# Altium PCB minireg-lt8410.PcbDoc
Units mm, origin at the board's own origin, x right, y up, seen from the top; angles counter-clockwise.
Board outline 10 x 10 mm, 4 copper layers (Top Layer, Mid-Layer 1, Mid-Layer 2, Bottom Layer); 11 components, 7 nets, 67 pads, 20 vias.
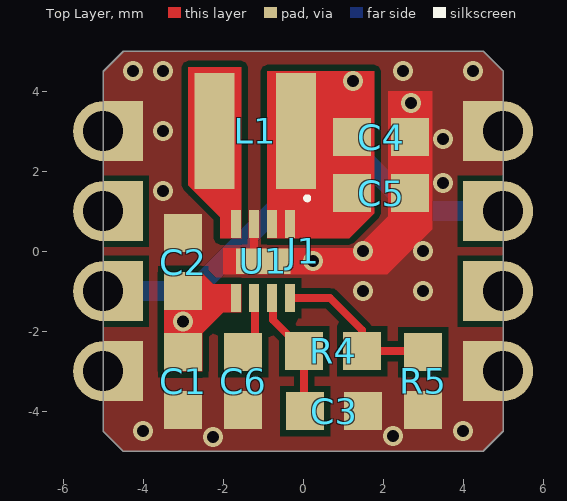
[diagram p0: Top Layer view]
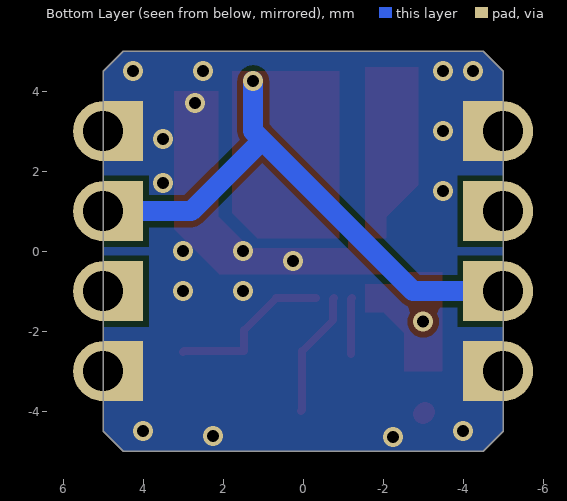
[diagram p1: Bottom Layer view, seen from below]
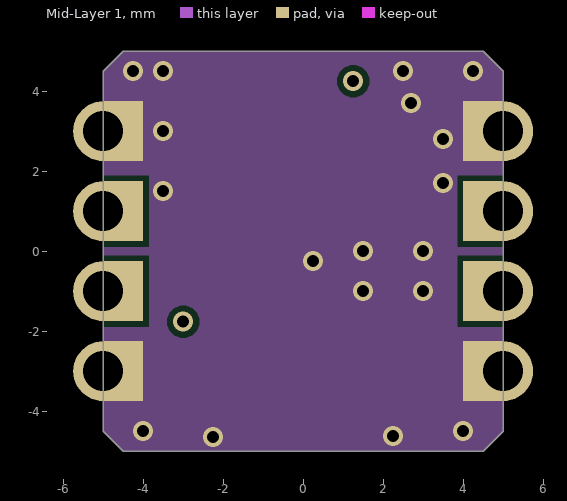
[diagram p2: Mid-Layer 1]
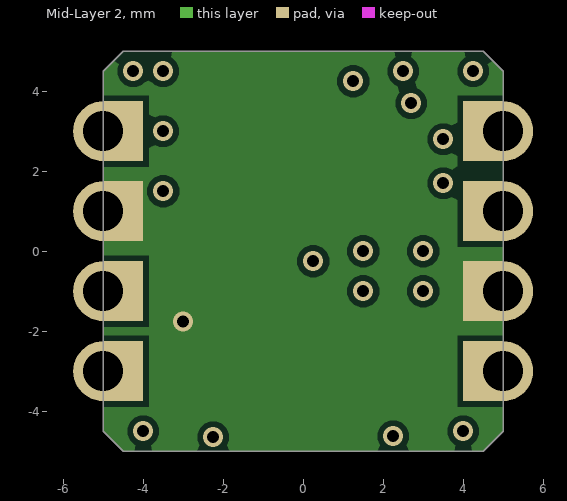
[diagram p3: Mid-Layer 2]
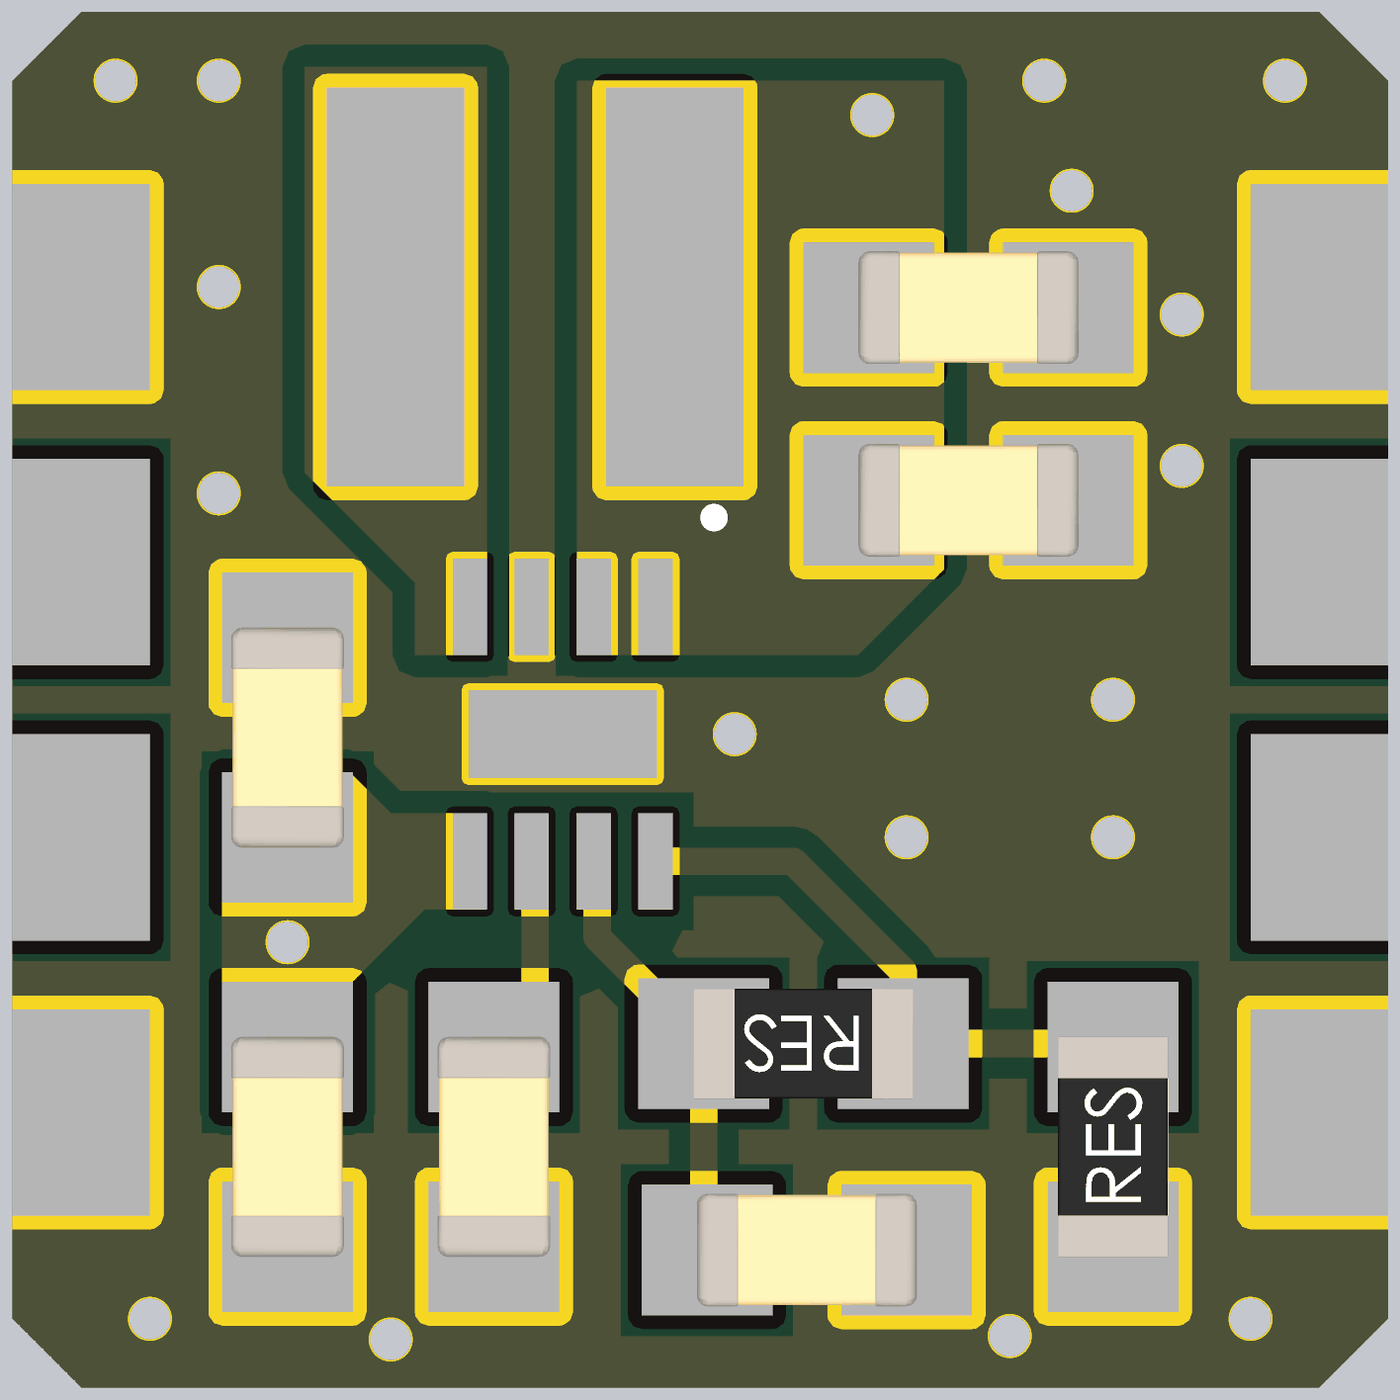
[diagram p4: 3D render of the assembled board from above, using the file's embedded part models]

## Layer stack, top to bottom
Top Solder: solder mask 0.0102, Solder Resist, Dk 3.5
Top Layer: signal copper 0.0356
Dielectric 1: dielectric 0.32, FR-4, Dk 4.8
Mid-Layer 1: signal copper 0.0356
Dielectric2: dielectric 0.32, FR-4, Dk 4.8
Mid-Layer 2: signal copper 0.0356
Dielectric3: dielectric 0.32, FR-4, Dk 4.8
Bottom Layer: signal copper 0.0356
Bottom Solder: solder mask 0.0102, Solder Resist, Dk 3.5

## Board outline
-5,-4.5 -5,4.5 -4.5,5 4.5,5 5,4.5 5,-4.5 4.5,-5 -4.5,-5

## Design rules (kind name [scope] priority, off if disabled: settings)
Clearance [All] p1: gap=0.15 ignorepadtopadclearanceinfootprint=FALSE
ComponentClearance ComponentClearance_1 [HasFootprint('MINIREG10x10')] p1: gap=0 collisioncheckmode=3 verticalgap=2540 showdistances=FALSE
ComponentClearance [All] p2: gap=0.254 collisioncheckmode=3 verticalgap=0.254 showdistances=FALSE
HoleSize [All] p1: absolutevalues=TRUE maxlimit=5 minlimit=0.3 maxpercent=80.000 minpercent=20.000
MinimumAnnularRing [All] p1: minimumring=0.1
MinimumSolderMaskSliver [All] p1: minsoldermaskwidth=0.1
PasteMaskExpansion [All] p1: expansion=0 percent=-10.000000
PolygonConnect PolygonConnect_1 [IsVia] p1: connectstyle=Direct reliefconductorwidth=0.254 reliefentries=4 polygonreliefangle="90 Angle" airgapwidth=0.254
PolygonConnect [All] p2: connectstyle=Direct reliefconductorwidth=0.254 reliefentries=4 polygonreliefangle="90 Angle" airgapwidth=0.254
RoutingVias [All] p1: holewidth=0.711 width=1.27 viastyle="Through Hole" minholewidth=0.711 minwidth=1.27 maxholewidth=0.711 maxwidth=1.27
SilkToSolderMaskClearance [IsPad] p1: minsilkscreentomaskgap=0.15 clearancetoexposedcopper=TRUE
SolderMaskExpansion [All] p1: expansion=0.1 istentingtop=FALSE
SupplyNets "Schematic Supply Nets_4" [InNet('VOUT')] p1: voltage=0.000
SupplyNets "Schematic Supply Nets_3" [InNet('VIN')] p2: voltage=0.000
SupplyNets "Schematic Supply Nets_2" [InNet('GND')] p3: voltage=0.000
Width [All] p1: maxlimit=0.5 minlimit=0.15 preferedwidth=0.2
25 further rules are at their usual default settings.

## Components (designator, comment, footprint, x,y, rotation, side; value= is the part's Value field where it differs from the comment)
C1 "CAP" CAP0603 -3,-3.25 r90 top value=1uF
C2 "CAP" CAP0603 -3,-0.275 r270 top value=100nF
C3 "CAP" CAP0603 0.775,-4 r180 top value=100nF
C4 "CAP" CAP0603 1.95,2.85 r180 top value=2.2uF
C5 "CAP" CAP0603 1.95,1.45 r180 top value=100nF
C6 "CAP" CAP0603 -1.5,-3.25 r90 top value=100nF
J1 "MINIREG10x10" MINIREG8_10x10R 0,0 r0 top locked
L1 "XFL3012-104MEC" XFL3012 -1.2,3 r180 top value=100uH
R4 "RES" RES0603 0.75,-2.5 r180 top value=100K
R5 "RES" RES0603 3,-3.25 r90 top value=187K
U1 "LT8410EDC-1" LT8410 -1,-0.25 r270 top

## Footprints (in the part's own frame and the unit in brackets; to place one, negate y for a bottom-side part, rotate by r counter-clockwise, add the part's x,y. Pads: shape width x height; smd on the part's side, far side on the other; paste and mask are expansions set on the pad)
CAP0603 [mm]
  rect 0.95x0.95 smd: 1(-0.725,0) 2(0.725,0)
  body extent -0.8,-0.41 0.8,0.41, height 0.57
LT8410 [mm] "SON, 8-Leads, Body 2x2mm, Pitch 0.45mm, Thermal Pad 1.37x0.64mm, Recommended"
  rect 0.7x0.25 smd mask+0.05: 1(-0.925,0.675) 2(-0.925,0.225) 3(-0.925,-0.225) 4(-0.925,-0.675) 5(0.925,-0.675) 6(0.925,-0.225) 7(0.925,0.225) 8(0.925,0.675)
  rect 0.64x1.37 smd mask+0.05: 9(0,0)
  silkscreen extent -1.62,1.05 -1.52,1.15, body extent -1,-1 1,1, height 0.8
MINIREG8_10x10R [mm] "8-pin 10x10mm castellated regulator footprint"
  round 1.5 hole 1: 1(-5,-3) 2(-5,-1) 3(-5,1) 4(-5,3) 5(5,3) 6(5,1) 7(5,-1) 8(5,-3)
  rect 1x1.5 smd: 1(-4.5,-3) 2(-4.5,-1) 3(-4.5,1) 4(-4.5,3) 5(4.5,3) 6(4.5,1) 7(4.5,-1) 8(4.5,-3)
  rect 1x1.5 on Mid1: 1(-4.5,-3) 2(-4.5,-1) 3(-4.5,1) 4(-4.5,3) 5(4.5,3) 6(4.5,1) 7(4.5,-1) 8(4.5,-3)
  rect 1x1.5 smd far side: 1(-4.5,-3) 2(-4.5,-1) 3(-4.5,1) 4(-4.5,3) 5(4.5,3) 6(4.5,1) 7(4.5,-1) 8(4.5,-3)
  rect 1x1.5 on Mid2: 1(-4.5,-3) 2(-4.5,-1) 3(-4.5,1) 4(-4.5,3) 5(4.5,3) 6(4.5,1) 7(4.5,-1) 8(4.5,-3)
RES0603 [mm]
  rect 0.95x0.95 smd: 1(-0.725,0) 2(0.725,0)
  body extent -0.8,-0.4 0.8,0.4, height 0.3
XFL3012 [mm]
  rect 1x2.9 smd: 1(-1.015,0) 2(1.015,0)
  body extent -1.5,-1.5 1.5,1.5, height 1.3

## Part data
C1: library part CAP-SM-0603-X7R-1uF, "CAP SM 0603 X7R 1uF", Manufacturer=GENERIC, Package=0603, Part Number=CAP-SM-0603-X7R-1uF
C2 C3 C5 C6: library part CAP-SM-0603-X7R-100nF, "CAP SM 0603 X7R 100nF", Manufacturer=GENERIC, Package=0603, Part Number=CAP-SM-0603-X7R-100nF
C4: library part CAP-SM-0603-X5R-2.2uF, "CAP SM 0603 X5R 2.2uF", Manufacturer=GENERIC, Package=0603, Part Number=CAP-SM-0603-X5R-2.2uF
L1: "IND SM 100uH 290mA 3Ohm 1212 3x3mm"
R4: library part RES-SM-0603-100K, "RES SM 0603 100K", Manufacturer=GENERIC, Package=0603, Part Number=RES-SM-0603-100K
R5: library part RES-SM-0603-187K, "RES SM 0603 187K", Manufacturer=GENERIC, Package=0603, Part Number=RES-SM-0603-187K
U1: library part LT8410, "Ultralow Power Boost Converter with Output Disconnect, 8-pin SON (DC8), -40 to 125 degC, Pb-Free, Mini Tape and Reel", Manufacturer="Linear Technology", PartNumber=LT8410EDC-1#TRMPBF, ComponentLink1Description="Manufacturer URL", ComponentLink1URL=http://www.linear.com/, ComponentLink2Description=Datasheet, ComponentLink2URL=http://cds.linear.com/docs/en/datasheet/84101fb.pdf, ComponentLink3Description="Package Specification", ComponentLink3URL=http://cds.linear.com/docs/en/packaging/DFN_8_05-08-1719.pdf, DatasheetVersion="Rev. B", Mounting Technology="Surface Mount", Number of Outputs=1, PackageDescription="8-Pin Plastic DFN, Body 2 x 2 mm, Pitch 0.45 mm", PackageReference=DC8, PackageVersion="Rev. A, 04/2009", Packing="Mini Tape and Reel", RoHS=TRUE

## Via types
v1: diameter 0.5, hole 0.3, Top Layer to Bottom Layer, tented both sides, 20 vias

## Nets (pads, with @x,y where several pads share a name; then routed paths per layer and width w, separated by ;. In a path a pad name is that pad's centre, name@x,y a point inside that pad or via, vN(x,y) a via of type N, cw(c..) or ccw(c..) an arc to the next point about the centre after c; other vN are vias at no path point)
GND: C1.1 C2.1 C3.1 C4.1 C5.1 C6.1 J1.1 J1.4 J1.5 J1.8 R5.1 U1.3 U1.9 | length 1.3
  Top Layer w0.2: C1.1@-3.05,-4.025 C1.1 ; U1.3 -1.225,-0.03 -1.005,-0.25 U1.9 ; C4.1@2.45,2.875 2.425,2.85 C4.1@2.525,2.75
  Top Layer w0.5: C1.1@-3.05,-4.025 C1.1@-3,-4.075
  other v1: -2.25,-4.65 2.25,-4.625 -4,-4.5 4,-4.5 1.5,-1 3,-1 0.25,-0.25 1.5,0 3,0 -3.5,1.5 3.5,1.7 3.5,2.8 -3.5,3 2.7,3.7 -4.25,4.5 -3.5,4.5 2.5,4.5 4.25,4.5
NetC3_2: C3.2 R4.2 U1.7 | length 3.2
  Top Layer w0.2: U1.7 -0.75,-1.2 -0.75,-1.725 R4.2 0.025,-3.975 C3.2
NetC6_2: C6.2 U1.6 | length 1.4
  Top Layer w0.2: U1.6 -1.2,-1.2 C6.2@-1.2,-2.575
NetL1_2: L1.2 U1.4
NetR4_1: R4.1 R5.2 U1.8 | length 4.2
  Top Layer w0.2: U1.8 0.675,-1.175 1.475,-1.975 R4.1 2.975,-2.5 R5.2
VIN: C4.2 C5.2 J1.2 J1.6 L1.1 U1.1 U1.2 | length 13.9
  Bottom Layer w0.5: J1.2@-5,-1 -4.5,-1 -2.75,-1 1.025,2.775 ; v1(1.25,4.25) 1.25,3 1.025,2.775 ; J1.6@5,1 4.5,1 2.8,1 1.025,2.775
VOUT: C1.2 C2.2 J1.3 J1.7 U1.5 | length 2
  Top Layer w0.2: C1.2 C2.2
  Top Layer w0.254: J1.7@4.275,-1 J1.7@4.763,-1
  other v1: -3,-1.762

## Polygon pours and split planes (outlines as drawn)
GND on Mid-Layer 1 "GND_L02_P001" (solid, pour order 1): -4.5,5 -5,4.5 -5,-4.5 -4.5,-5 4.5,-5 5,-4.5 5,4.5 4.5,5
GND on Top Layer "GND_L01_P000" (solid, pour order 0): -4.5,5 -5,4.5 -5,-4.5 -4.5,-5 4.5,-5 5,-4.5 5,4.5 4.5,5
GND on Bottom Layer "GND_L04_P002" (solid, pour order 2): -4.5,5 -5,4.5 -5,-4.5 -4.5,-5 4.5,-5 5,-4.5 5,4.5 4.5,5
VOUT on Mid-Layer 2 "VOUT_L03_P003" (solid, pour order 3): -4.5,5 -5,4.5 -5,-4.5 -4.5,-5 4.5,-5 5,-4.5 5,4.5 4.5,5

## Other copper
Top Layer:
  region net VOUT: -1.55,-0.825 -2.25,-0.825 -2.55,-0.525 -3.475,-0.525 -3.475,-3 -2.525,-3 -2.525,-2.05 -2,-1.525 -1.55,-1.525
  region net GND: 1.325,0.075 -0.15,0.075 -1.85,0.075 -2,0.075 -2,-0.575 1.325,-0.575
  region net NetL1_2: -1.55,0.325 -1.55,4.6 -2.875,4.6 -2.875,1.65 -2.075,0.85 -2.075,0.325
  region net GND: 3.225,4 3.225,0.55 2.1,-0.575 1.325,-0.575 1.325,0.075 2.125,0.875 2.125,4
  region net VIN: -0.895,0.325 -0.895,1.725 -0.895,4.5 1.775,4.5 1.775,0.95 1.15,0.325

## Silkscreen, mask and mechanical layers (free items; w line width, h text height)
Mechanical 1:
  the board outline again, w0.1